# EAGLE board mpu6050-turtle (EAGLE 9.6.2)
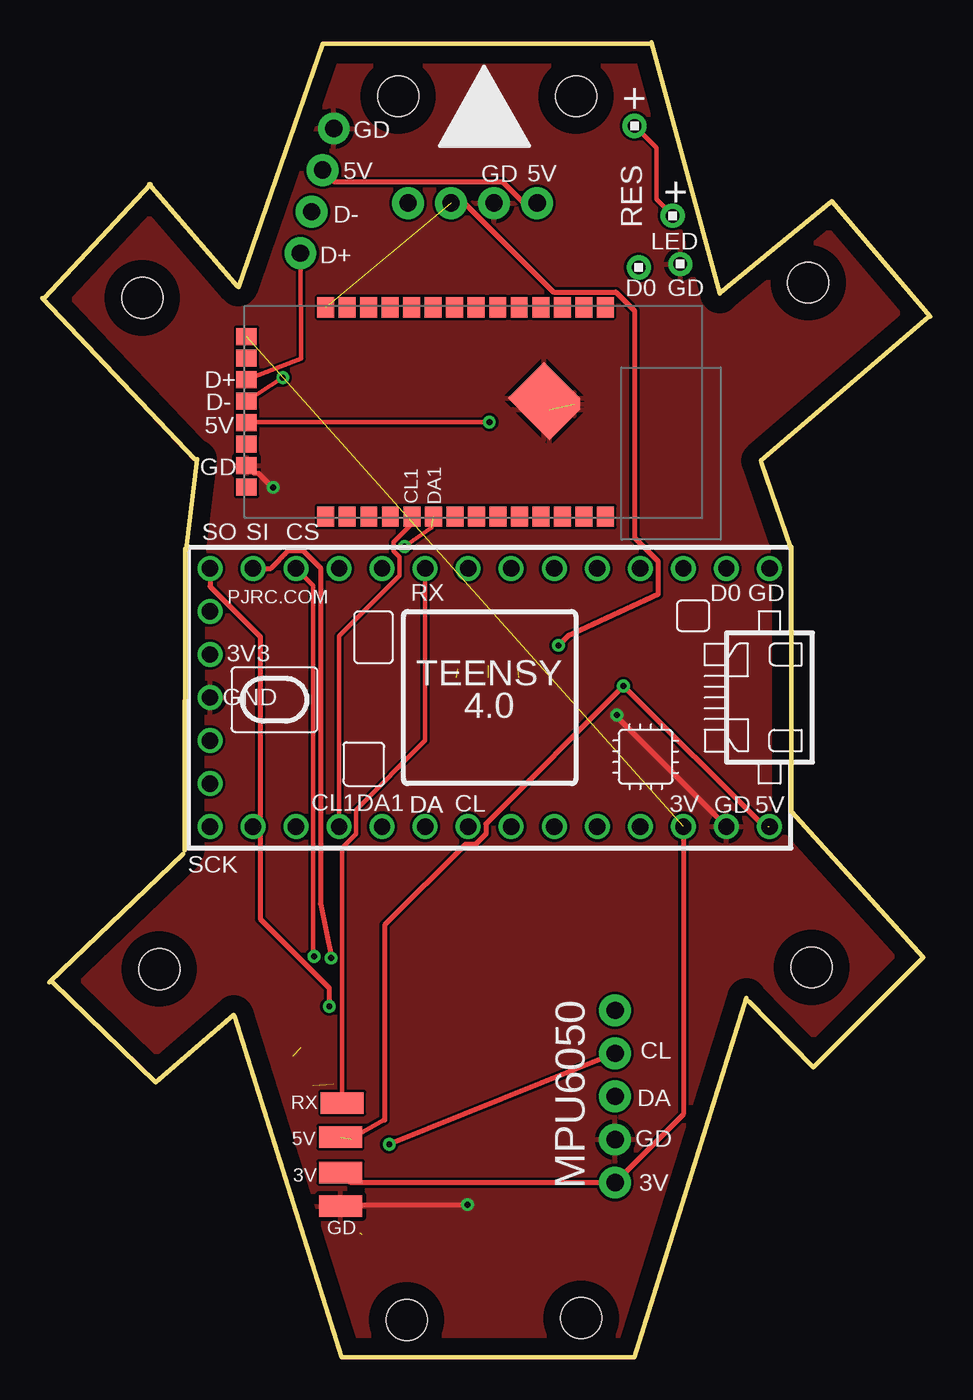
[diagram p0: board, top side]
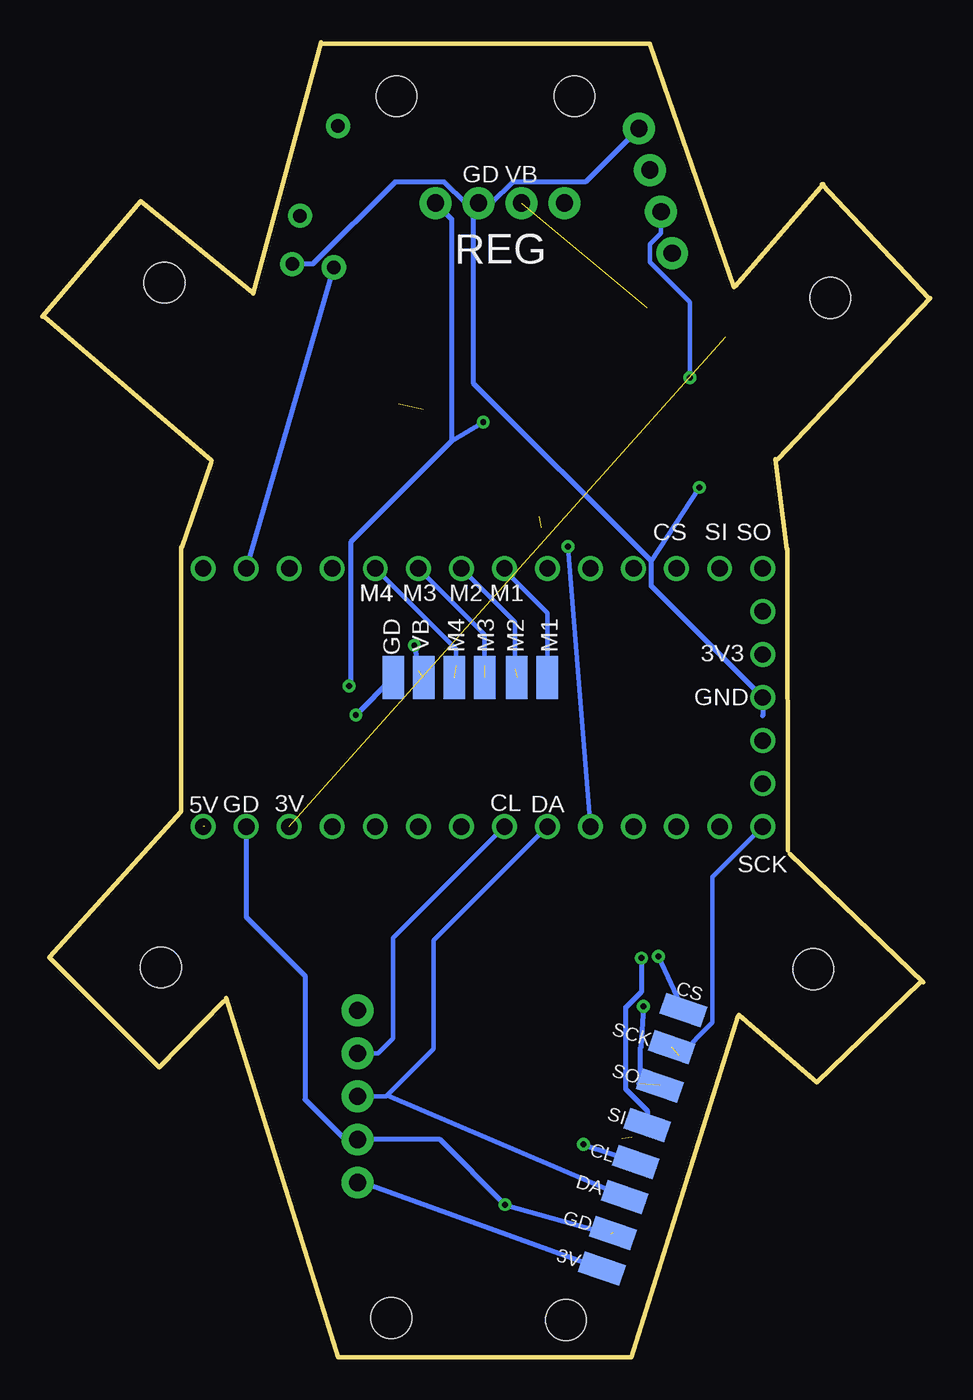
[diagram p1: board, bottom side, seen from below]

Size 52.4 x 77.58 mm. Coordinates in mm from the lower left corner, seen from the top.
Outline: 34.85,0 17.65,0 11.35,20.1
Outline: 8.42,47.72 8.4,29.9
Outline: 44.2,47.8 44.2,32.3
Outline: 42.44,52.78 44.18,47.75
Outline: 16.55,77.51 35.85,77.51
Outline: 52.3,61.4 42.4,52.9
Outline: 52.4,61.4 46.6,68.2 40,62.8
Outline: 35.94,77.58 39.98,62.75
Outline: 16.54,77.48 11.58,63.15
Outline: 9.14,52.98 8.48,47.65
Outline: 0,62.5 9,53
Outline: 6.3,69.2 11.5,63.2
Outline: 8.3,29.7 0.4,22.1
Outline: 0.6,22.1 6.7,16.2 11.3,20.2
Outline: 41.55,21.2 34.95,0
Outline: 41.7,21 45.5,17.1 52,23.6 44.2,32.2
Outline: 0.1,62.5 6.4,69.2
Copper layers (1*16): Top 0.035mm / dielectric 1.5mm / Bottom 0.035mm
Design rules "default": minimum track width 6mil, minimum drill 0.35mm, track to track 6mil, track to pad 6mil, pad to pad 6mil, via to via 6mil, smd to smd 6mil, copper to edge 40mil, drill to drill 6mil, minimum pad ring 10mil, minimum via ring 8mil, stop-mask expansion 4mil, vias tented up to drill 0mil, thermal gap 10mil
Holes 2.4 mm at 21,74.4 31.5,74.4 21.5,2.2 31.8,2.3 5.9,62.5 6.9,22.9 45.4,23 45.2,63.4

## Footprints (pad centres in the part's own frame; a part is rotated, then mirrored left to right if it is on the bottom)
SMD1,27-2,54 = smd 1.27 x 2.54: 1 0,0
1X05_NO_SILK = drill 1.016 pad 1.88: 1 0,0; 2 2.54,0; 3 5.08,0; 4 7.62,0; 5 10.16,0
1X04_NO_SILK = drill 1.016 pad 1.88: 1 0,0; 2 2.54,0; 3 5.08,0; 4 7.62,0
TEENSY_4.0 = drill 0.965: 0/RX -13.97,-7.62; 1/TX -11.43,-7.62; 2 -8.89,-7.62; 3/CANTX -6.35,-7.62; 3V3_LN 16.51,-2.54; 3V3_LO -11.43,7.62; 4/CANRX -3.81,-7.62; 5 -1.27,-7.62; 6 1.27,-7.62; 7 3.81,-7.62; 8 6.35,-7.62; 9/CS 8.89,-7.62; 10/CS 11.43,-7.62; 11/MOSI 13.97,-7.62; 12/MISO 16.51,-7.62; 13/SCK 16.51,7.62; 14/A0 13.97,7.62; 15/A1 11.43,7.62; 16/A2 8.89,7.62; 17/A3 6.35,7.62; 18/A4/SDA 3.81,7.62; 19/A5/SCL 1.27,7.62; 20/A6 -1.27,7.62; 21/A7 -3.81,7.62; 22/A8 -6.35,7.62; 23/A9 -8.89,7.62; GND -16.51,-7.62; GND2 -13.97,7.62; GND3 16.51,0; ON/OFF 16.51,5.08; PROG 16.51,2.54; VBAT\ 16.51,-5.08; VIN -16.51,7.62
TINYPICO-NANO-CONNECTOR = smd 1.2 x 1: 3V3 0.1,10.725; 5V 0.1,5.645; D+ 0.1,8.185; D- 0.1,6.915; EN 0.1,9.455; GND$1 0.1,3.105; RESET 0.1,4.375; STAT 0.1,1.835 | smd 3 x 3 rotated 45: GND$2 17.643,7.082 | smd 0.66 x 0.671: GND$3 19.436,6.746 | smd 2.54 x 2.54 rotated 45: GND$4 17.971,6.413 | smd 1 x 1.2: IO0 12.395,0.1; IO2 6.034,12.44; IO4 7.304,12.44; IO5 8.585,0.1; IO9 13.665,0.1; IO12 8.574,12.44; IO13 9.844,12.44; IO14 11.114,12.44; IO15 12.384,12.44; IO18 7.315,0.1; IO19 6.045,0.1; IO21 11.125,0.1; IO22 9.855,0.1; IO23 4.775,0.1; IO25 16.194,12.44; IO26 14.924,12.44; IO27 13.654,12.44; IO32 17.464,12.44; IO33 18.734,12.44; IO34 20.004,12.44; IO35 21.274,12.44; IO36 21.285,0.1; IO37 20.015,0.1; IO38 18.745,0.1; IO39 17.475,0.1; RX 14.935,0.1; TX 16.205,0.1; VBAT 4.764,12.44
1X1 = drill 0.8 pad 1.422: 1 0,0

## Placement (x,y rotation side)
3V  [SMD1,27-2,54]  17.6,10.9 90 top
3V1  [SMD1,27-2,54]  17.59,12.98 90 top
3V2  [SMD1,27-2,54]  19.38,5.22 71 bottom
3V3  [SMD1,27-2,54]  15.95,16.03 71 bottom
CS  [SMD1,27-2,54]  14.56,20.47 71 bottom
GD  [SMD1,27-2,54]  17.6,8.9 90 top
GD1  [SMD1,27-2,54]  18.73,7.33 71 bottom
GD2  [SMD1,27-2,54]  17.38,11.51 71 bottom
GND  [SMD1,27-2,54]  31.7,40.1 0 bottom
J1  [1X05_NO_SILK]  33.8,10.3 90 top
J2  [1X04_NO_SILK]  17.2,72.5 255 top
M1  [SMD1,27-2,54]  22.6,40.1 0 bottom
M2  [SMD1,27-2,54]  24.4,40.1 0 bottom
M3  [SMD1,27-2,54]  26.3,40.1 0 bottom
M4  [SMD1,27-2,54]  28.1,40.1 0 bottom
REG  [1X04_NO_SILK]  29.2,68.1 180 top
RX  [SMD1,27-2,54]  17.7,15 90 top
RX1  [SMD1,27-2,54]  18.03,9.45 71 bottom
RX2  [SMD1,27-2,54]  16.71,13.69 71 bottom
SCK  [SMD1,27-2,54]  15.26,18.29 71 bottom
U$1  TEENSY_4.0  [TEENSY_4.0]  26.4,38.92 180 top
U$2  TINYPICO-NANO-CONNECTOR  [TINYPICO-NANO-CONNECTOR]  11.95,49.5 0 top
U$3  1X1  [1X1]  35.2,64.3 0 top
U$4  1X1  [1X1]  34.95,72.65 0 top
U$6  1X1  [1X1]  37.2,67.35 0 top
U$7  1X1  [1X1]  37.65,64.5 0 top
VBAT  [SMD1,27-2,54]  29.9,40.1 0 bottom

## Library data of the parts
3V 3V1-3V3 CS GD GD1 GD2 GND M1-M4 RX RX1 RX2 SCK VBAT = wirepad
J1 = SparkFun-Connectors
J2 REG = SparkFun-Connectors; PROD_ID: CONN-09696
U$1 = TEENSY 4.0
U$2 = TinyPICO_NANO_Eagle
U$3 U$4 U$6 U$7 = headers(2mm)

## Nets
3V3: 3V2.1 3V.1 J1.1 U$1.3V3_LO U$2.3V3
5V: 3V1.1 J2.2 REG.1 U$1.VIN U$2.5V
CS: CS.1 U$1.10/CS
D+: J2.4 U$2.D+
D-: J2.3 U$2.D-
G2: U$1.GND
GND: GD1.1 GD.1 GND.1 J1.2 J2.1 REG.2 U$1.GND2 U$1.GND3 U$2.GND$1 U$2.GND$2 U$2.GND$3 U$2.GND$4 U$7.1
LED_R_IN: U$1.0/RX U$3.1
LED_R_OUT: U$4.1 U$6.1
M1: M1.1 U$1.6
M2: M2.1 U$1.5
M3: M3.1 U$1.4/CANRX
M4: M4.1 U$1.3/CANTX
MISO: 3V3.1 U$1.12/MISO
MOSI: RX2.1 U$1.11/MOSI
RX: RX.1 U$1.7
SCK: SCK.1 U$1.13/SCK
SCL: GD2.1 J1.4 U$1.19/A5/SCL
SCL1: U$1.16/A2 U$2.IO22
SDA: J1.3 RX1.1 U$1.18/A4/SDA
SDA1: U$1.17/A3 U$2.IO21
VB: REG.3 U$2.VBAT VBAT.1

## Tracks (layer width: path | path; a pad name or v marks a point on that pad's centre or on a via)
3V3  (1 unrouted)
  Top 0.305: 18.5,10.9 3V.1 18.2,10.3 J1.1 37.83,14.33 U$1.3V3_LO
  Bottom 0.305: 3V2.1 33.42,10.3 J1.1
5V  (via drill 0.35)  (2 unrouted)
  Top 0.305: 42.81,31.3 42.6,31.3 v34.3,39.6 26.17,31.47 26.17,30.87 25.56,30.26 24.96,30.26 20.2,25.5 20.2,14 18.2,12.87 | REG.1 28.42,68.1 27.18,69.34 17.25,69.34 J2.2 | v26.38,55.18 U$2.5V
  Bottom 0.305: 28.25,54.05 28.25,67.15 REG.1 | 28.25,54.05 34.21,48.09 34.21,39.69 v34.3,39.6 | 28.25,54.05 v26.38,55.18
CS  (via drill 0.35)
  Top 0.254: v16.03,23.65 15.99,23.7 15.99,45.52 U$1.10/CS
  Bottom 0.254: v16.03,23.65 CS.1
D+
  Top 0.254: U$2.D+ 15.25,58.91 J2.4
D-  (via drill 0.35)
  Top 0.254: v14.19,57.8 U$2.D-
  Bottom 0.254: J2.3 15.88,66.33 16.54,65.68 16.54,64.6 14.19,62.25 v14.19,57.8
GND  (via drill 0.35)  (2 unrouted)
  Top 0.305: U$1.GND2 33.9,37.77 v33.9,37.9 | 18.84,8.9 GD.1 17.7,9 v25.1,9 | v13.62,51.32 13.59,51.32 12.78,52.14 12.52,52.14 U$2.GND$1
  Bottom 0.305: v33.9,37.9 GND.1 | U$1.GND2 40.37,25.97 36.9,22.5 36.9,15.2 34.54,12.84 J1.2 28.94,12.84 v25.1,9 18.88,7.25 | 16.47,46.97 16.47,45.5 U$1.GND3 9.89,37.85 | 16.47,46.97 16.66,47.17 26.95,57.45 26.95,67.81 REG.2 26.7,68.1 | 26.7,68.1 27.44,68.1 28.68,69.34 31.6,69.34 36.44,64.5 U$7.1 | J2.1 20.36,69.34 24.64,69.34 25.88,68.1 26.7,68.1 | 16.47,46.97 v13.62,51.32
  pour Top: 59.95,80.26 59.95,-1.25 -8.5,-1.25 -8.5,80.26
LED_R_IN
  Bottom 0.305: U$3.1 U$1.0/RX
LED_R_OUT
  Top 0.254: U$4.1 36.23,71.37 36.23,68.32 U$6.1
M1
  Bottom 0.254: U$1.6 25.13,46.43 22.6,43.9 M1.1
M2  (1 unrouted)
  Bottom 0.254: U$1.5 24.5,43.37 24.5,40.6
M3  (1 unrouted)
  Bottom 0.254: U$1.4/CANRX 26.3,42.63 26.3,40.8
M4  (1 unrouted)
  Bottom 0.254: U$1.3/CANTX 28,41.79 28,40.8
MISO  (via drill 0.35)  (1 unrouted)
  Top 0.305: U$1.12/MISO 9.89,45.47 12.85,42.51 12.85,25.86 16.94,21.78 v16.94,20.7
  Bottom 0.305: v16.94,20.7 17.07,18.29 17.12,18.25 17.12,16.21 17.19,16.14
MOSI  (via drill 0.35)
  Top 0.305: U$1.11/MOSI 13.5,46.54 14.54,47.58 15.4,47.58 16.42,46.56 16.42,26.76 17.06,23.55 v17.04,23.55
  Bottom 0.305: v17.04,23.55 17.04,21.56 17.99,20.62 17.99,15.83 16.7,14.54 RX2.1
RX
  Top 0.254: U$1.7 22.59,36.39 18.5,32.3 18.5,31.75 18.53,31.72 18.53,30.88 17.7,30.05 RX.1
SCK  (1 unrouted)
  Bottom 0.203: 9.89,31.59 U$1.13/SCK
  Bottom 0.254: 14.81,17.79 12.85,19.75 12.85,28.34 U$1.13/SCK
SCL  (via drill 0.35)
  Top 0.305: J1.4 v20.47,12.55
  Bottom 0.254: U$1.19/A5/SCL 31.7,24.73 31.7,18.8 32.58,17.92 J1.4
  Bottom 0.305: GD2.1 20.45,12.53 v20.47,12.55
SCL1
  Top 0.254: U$2.IO22 21.8,49.19 20.72,48.1 20.72,47.56 21.07,47.21 21.07,46.12 17.51,42.56 U$1.16/A2
SDA
  Bottom 0.254: U$1.18/A4/SDA 29.3,24.59 29.3,18.2 32.06,15.44 | 32.06,15.44 32.12,15.38 J1.3 | 32.06,15.44 RX1.1
SDA1  (via drill 0.35)  (1 unrouted)
  Top 0.254: v21.38,47.83 22.95,48.94
  Bottom 0.254: U$1.17/A3 v21.38,47.83
VB  (via drill 0.35)  (2 unrouted)
  Top 0.305: REG.3 24.9,68.1 30.15,62.84 33.85,62.84 34.94,61.75 34.94,48.36 36.33,46.97 36.33,45 31.01,42.56 v30.45,42
  Bottom 0.305: v30.45,42 30.2,40.5

## Text on the board
tNames: + | GD | 5V | GD | 5V | + | D- | RES | D+ | LED | D0 | GD | D+ | D- | 5V | DA1 | GD | CL1 | SO | SI | CS | RX | D0 | GD | 3V3 | GND | CL1 | DA1 | DA | DA | CL | 3V | 5V | GD | SCK | CL | RX | DA | 5V | GD | 3V | MPU6050 | 3V | GD
bNames: VB | GD | REG | SO | SI | CS | M1 | M2 | M3 | M4 | M4 | M1 | M2 | M3 | M4 | VB | GD | 3V3 | GND | DA | CL | 3V | GD | 5V | SCK | CS | SCK | SO | SI | CL | DA | GD | 3V